# EAGLE board activity_monitor_v1.3 (EAGLE 6.4)
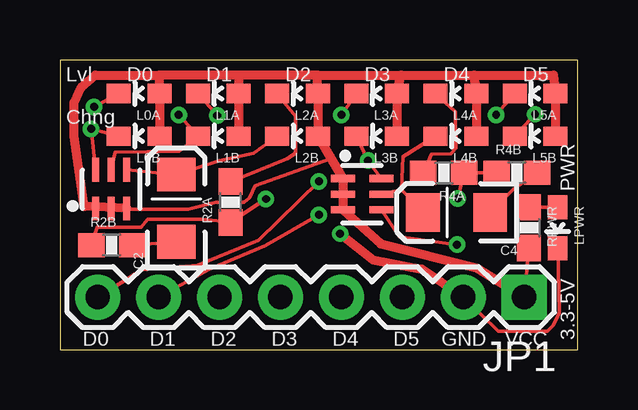
[diagram p0: board, top side]
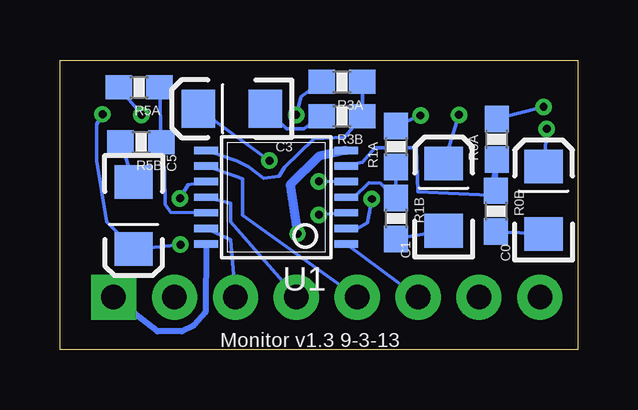
[diagram p1: board, bottom side, seen from below]

Size 21.59 x 12.06 mm. Coordinates in mm from the lower left corner, seen from the top.
Outline: 0,0 21.59,0 21.59,12.06 0,12.06 0,0
Copper layers (1*16): Top 0.0356mm / dielectric 1.5011mm / Bottom 0.0356mm
Design rules "OSHPark *": minimum track width 6mil, minimum drill 13mil, track to track 6mil, track to pad 6mil, pad to pad 6mil, via to via 6mil, smd to smd 6mil, copper to edge 15mil, drill to drill 6mil, minimum pad ring 7mil, minimum via ring 7mil, stop-mask expansion 0mil, vias tented up to drill 13mil, thermal gap 10mil
Net classes: 0 default: width 0.152 mm, clearance 0.152 mm

## Footprints (pad centres in the part's own frame; a part is rotated, then mirrored left to right if it is on the bottom)
EIA3216 = smd 1.4 x 1.6: A 1.4,0; C -1.4,0
1X08 = drill 1.016 pad 1.88 square: 1 0,0 | drill 1.016 pad 1.88: 2 2.54,0; 3 5.08,0; 4 7.62,0; 5 10.16,0; 6 12.7,0; 7 15.24,0; 8 17.78,0
0603_LED = smd 0.8 x 1.003: A 0,-0.852; C 0,0.852
0603-RES = smd 1.1 x 1: 1 -0.85,0; 2 0.85,0
TSSOP14 = smd 0.305 x 0.991: 1 -1.95,-2.918; 2 -1.3,-2.918; 3 -0.65,-2.918; 4 0,-2.918; 5 0.65,-2.918; 6 1.3,-2.918; 7 1.95,-2.918; 8 1.95,2.918; 9 1.3,2.918; 10 0.65,2.918; 11 0,2.918; 12 -0.65,2.918; 13 -1.3,2.918; 14 -1.95,2.918
SOT363 = smd 0.3 x 0.99: 1 -0.65,-0.8; 2 0,-0.8; 3 0.65,-0.8; 4 0.65,0.81; 5 0,0.81; 6 -0.65,0.81

## Placement (x,y rotation side)
C0  [EIA3216]  1.42,6.22 90 bottom
C1  [EIA3216]  5.59,6.35 90 bottom
C2  [EIA3216]  4.85,5.89 90 top
C3  [EIA3216]  14.43,10.03 180 bottom
C4  [EIA3216]  16.54,5.71 180 top
C5  [EIA3216]  18.52,5.59 270 bottom
JP1  [1X08]  19.35,2.18 180 top
L0A  [0603_LED]  3.3,10.67 90 top
L0B  [0603_LED]  3.3,8.89 90 top
L1A  [0603_LED]  6.6,10.67 90 top
L1B  [0603_LED]  6.6,8.89 90 top
L2A  [0603_LED]  9.91,10.67 90 top
L2B  [0603_LED]  9.91,8.89 90 top
L3A  [0603_LED]  13.21,10.67 90 top
L3B  [0603_LED]  13.21,8.89 90 top
L4A  [0603_LED]  16.51,10.67 90 top
L4B  [0603_LED]  16.51,8.89 90 top
L5A  [0603_LED]  19.81,10.67 90 top
L5B  [0603_LED]  19.81,8.89 90 top
LPWR  [0603_LED]  20.75,5.08 180 top
R0A  330  [0603-RES]  3.38,8.76 90 bottom
R0B  330  [0603-RES]  3.4,5.77 270 bottom
R1A  330  [0603-RES]  7.57,8.46 90 bottom
R1B  330  [0603-RES]  7.57,5.46 270 bottom
R2A  330  [0603-RES]  7.11,6.15 90 top
R2B  330  [0603-RES]  2.16,4.34 0 top
R3A  330  [0603-RES]  9.83,11.15 180 bottom
R3B  330  [0603-RES]  9.83,9.73 180 bottom
R4A  330  [0603-RES]  16,7.37 180 top
R4B  330  [0603-RES]  19.05,7.37 0 top
R5A  330  [0603-RES]  18.29,10.92 180 bottom
R5B  330  [0603-RES]  18.21,8.64 180 bottom
RPWR  330  [0603-RES]  19.56,5.08 270 top
U1  [TSSOP14]  12.57,6.35 90 bottom
U$1  SD103ATW-7-F  [SOT363]  2.13,6.68 0 top
U$2  SD103ATW-7-F  [SOT363]  12.6,6.48 270 top

## Library data of the parts
C0 C1-C3 = SparkFun-Capacitors; PROD_ID: CAP-00811; VALUE: 10uF
C4 C5 = SparkFun-Capacitors; PROD_ID: CAP-00811
JP1 = SparkFun-Connectors
L0A L0B L1A L1B L2A L2B L3A L3B L4A L4B L5A L5B LPWR R0A R0B R1A R1B R2A R2B R3A R3B R4A R4B R5A R5B RPWR U1 U$1 U$2 = kmod

## Nets
D0: JP1.8 U1.5
D1: JP1.7 U1.3
D2: JP1.6 U1.1
D3: JP1.5 U1.9
D4: JP1.4 U1.11
D5: JP1.3 U1.13
GND: JP1.2 LPWR.C U1.7
N$1: R0A.1 R0B.1 U1.6
N$2: R1A.1 R1B.1 U1.4
N$3: C5.C R5B.2
N$4: C4.C R4B.2
N$5: L0A.C R0A.2
N$6: L1A.C R1A.2
N$7: L2A.C R2A.2
N$8: L3A.C R3A.2
N$9: C3.C R3B.2
N$10: C0.A L0B.C U$1.6
N$11: L4A.C R4A.2
N$12: C2.C R2B.2
N$13: LPWR.A RPWR.1
N$14: L5A.C R5A.2
N$15: C1.C R1B.2
N$16: R2A.1 R2B.1 U1.2
N$17: R3A.1 R3B.1 U1.8
N$18: C0.C R0B.2
N$19: R4A.1 R4B.1 U1.10
N$20: R5A.1 R5B.1 U1.12
N$27: C1.A L1B.C U$1.5
N$28: C2.A L2B.C U$1.4
N$29: C3.A L3B.C U$2.6
N$30: C4.A L4B.C U$2.5
N$31: C5.A L5B.C U$2.4
VCC: JP1.1 L0A.A L0B.A L1A.A L1B.A L2A.A L2B.A L3A.A L3B.A L4A.A L4B.A L5A.A L5B.A RPWR.2 U1.14 U$1.1 U$1.2 U$1.3 U$2.1 U$2.2 U$2.3

## Tracks (layer width: path | path; a pad name or v marks a point on that pad's centre or on a via)
D0  (via drill 0.33 pad 0.69)
  Top 0.152: JP1.8 3.43,3.33 5.74,3.5 8.28,4.55 v10.79,7.01
  Bottom 0.152: v10.79,7.01 U1.5
D1  (via drill 0.33 pad 0.69)
  Top 0.152: JP1.7 6.22,3.35 8.56,4.32 v10.79,5.61
  Bottom 0.152: U1.3 v10.79,5.61
D2
  Bottom 0.152: JP1.6 U1.1
D3
  Bottom 0.152: JP1.5 13.97,5.59 13.97,7.11 U1.9
D4
  Bottom 0.152: JP1.4 14.48,5.33 14.48,6.1 U1.11
D5
  Bottom 0.152: JP1.3 14.48,4.57 U1.13
GND  (via drill 0.33 pad 0.69)
  Top 0.152: JP1.2 18.29,0.76 20.32,0.76 20.57,1.02 20.83,1.52 LPWR.C
  Top 0.381: v11.68,4.83 13.06,3.73 15.09,3.35 JP1.2
  Bottom 0.381: U1.7 10.79,8.05 11.99,6.86 v11.68,4.83
N$1
  Bottom 0.152: R0B.1 R0A.1 3.68,6.43 6.66,6.58 6.73,8.41 8.46,8.41 8.97,7.8 U1.6
N$2
  Bottom 0.152: R1A.1 R1B.1 8.23,6.93 8.71,6.96 9.32,6.35 U1.4
N$3
  Bottom 0.152: C5.C R5B.2
N$4
  Top 0.152: C4.C 18.9,6.68 R4B.2
N$5  (via drill 0.33 pad 0.69)
  Top 0.152: L0A.C v1.42,10.11
  Bottom 0.152: R0A.2 v1.42,10.11
N$6  (via drill 0.33 pad 0.69)
  Top 0.152: v6.55,9.75 L1A.C
  Bottom 0.152: R1A.2 v6.55,9.75
N$7
  Top 0.152: R2A.2 9.47,7.95 9.83,8.18 9.83,9.73 L2A.C
N$8  (via drill 0.33 pad 0.69)
  Top 0.152: L3A.C v11.73,9.78
  Bottom 0.152: R3A.2 11.53,10.54 v11.73,9.78
N$9
  Bottom 0.152: R3B.2 11.4,9.2 12.14,9.2 C3.C
N$10  (via drill 0.33 pad 0.69)
  Top 0.152: L0B.C v1.29,9.2 U$1.6
  Bottom 0.152: C0.A v1.29,9.2
N$11
  Top 0.152: L4A.C 16.48,9.91 16.51,8.38 16.31,8.15 15.49,8.13 R4A.2
N$12
  Top 0.152: C2.C R2B.2
N$13
  Top 0.152: RPWR.1 LPWR.A
N$14  (via drill 0.33 pad 0.69)
  Top 0.152: L5A.C v18.19,9.78
  Bottom 0.152: R5A.2 v18.19,9.78
N$15
  Bottom 0.152: R1B.2 C1.C
N$16  (via drill 0.33 pad 0.69)
  Top 0.152: R2B.1 1.55,5.11 3.38,5.11 3.66,5.44 5.97,5.44 R2A.1 v8.59,6.27
  Bottom 0.152: U1.2 9.2,5.03 8.76,5.28 v8.59,6.27
N$17
  Bottom 0.152: R3A.1 R3B.1 9.73,8.84 11,8.79 12.22,7.59 12.45,7.21 13.11,7.14 13.72,7.62 14.22,7.87 U1.8
N$18
  Bottom 0.152: R0B.2 C0.C
N$19  (via drill 0.33 pad 0.69)
  Top 0.152: R4B.1 R4A.1 v16.59,6.3
  Bottom 0.152: U1.10 16.26,6.86 v16.59,6.3
N$20
  Bottom 0.152: R5A.1 R5B.1 17.22,7.39 17.2,6.04 16.97,5.71 U1.12
N$27  (via drill 0.33 pad 0.69)
  Top 0.152: v4.95,9.78 L1B.C 4.98,8.26 2.31,8.23 U$1.5
  Bottom 0.152: C1.A v4.95,9.78
N$28
  Top 0.152: U$1.4 C2.A 6.63,7.87 8.08,8.18 L2B.C
N$29  (via drill 0.33 pad 0.69)
  Top 0.152: U$2.6 v12.85,7.87 L3B.C
  Bottom 0.152: C3.A v12.85,7.87
N$30
  Top 0.152: U$2.5 14.25,6.66 | 14.25,6.66 14.3,8.03 L4B.C | 14.25,6.66 C4.A
N$31  (via drill 0.33 pad 0.69)
  Top 0.152: L5B.C v19.81,9.8 | U$2.4 14.15,4.7 v16.56,4.37
  Bottom 0.152: v19.81,9.8 20.07,9.4 20.07,7.87 19.63,5.33 C5.A v16.56,4.37
VCC
  Top 0.152: U$1.1 U$1.2 U$1.3 2.79,5.84 5.33,5.84 6.5,6.15 7.67,6.15 7.9,6.33 8.13,6.83 11.28,7.95 | RPWR.2 JP1.1
  Top 0.381: U$1.3 1.02,5.97 0.58,8.89 0.58,10.29 0.89,10.92 1.47,11.43 4.14,11.43 | 4.14,11.43 L0A.A L0B.A | 7.36,11.43 7.47,11.4 L1A.A L1B.A | 7.36,11.43 4.14,11.43 | 10.74,11.43 L2A.A L2B.A U$2.1 U$2.2 U$2.3 13.38,4.4 17.37,3.4 JP1.1 | 10.74,11.43 7.36,11.43 | 10.74,11.43 14.22,11.43 | 14.22,11.43 17.27,11.43 | 17.27,11.43 20.57,11.43 L5A.A L5B.A | 17.27,11.43 L4A.A L4B.A | 14.22,11.43 L3A.A L3B.A
  Bottom 0.254: U1.14 15.52,1.55 16,1.02 16.51,0.76 17.53,0.76 JP1.1

## Text on the board
tPlace: Lvl | D0 | D1 | D2 | D3 | D4 | D5 | Chng | PWR | D0 | D1 | D2 | D3 | D4 | D5 | GND | VCC | 3.3-5V
bPlace: Monitor v1.3 9-3-13